# Altium PCB QuadCape_4L_PCB.PcbDoc
Units mil, origin at the board's own origin, x right, y up, seen from the top; angles counter-clockwise.
Board outline 3750 x 4475 mil, 4 copper layers (Top Layer, Power layer, Ground layer, Bottom Layer), stack 40.75 mil thick; 81 components, 111 nets, 353 pads, 56 vias.
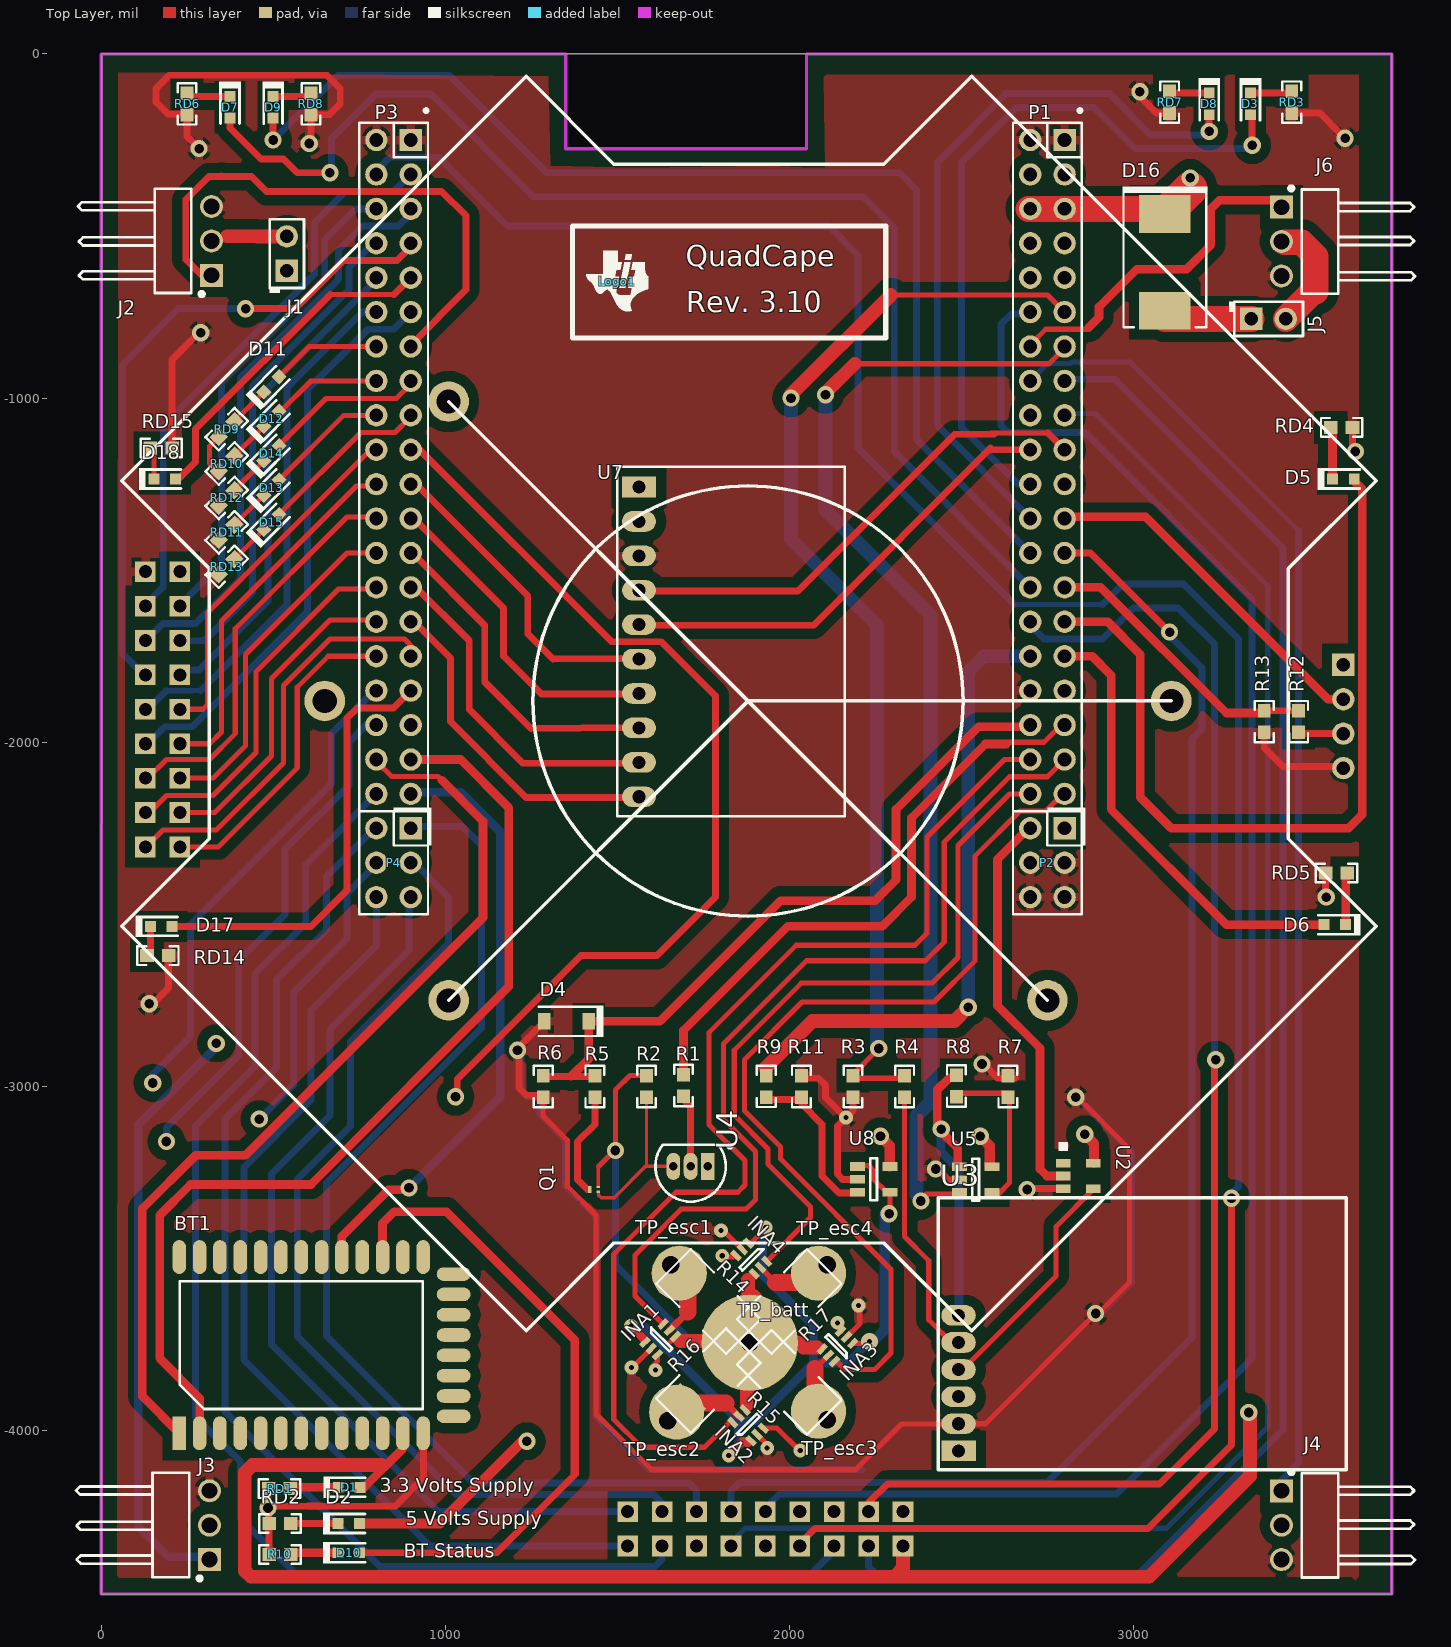
[diagram p0: Top Layer view]
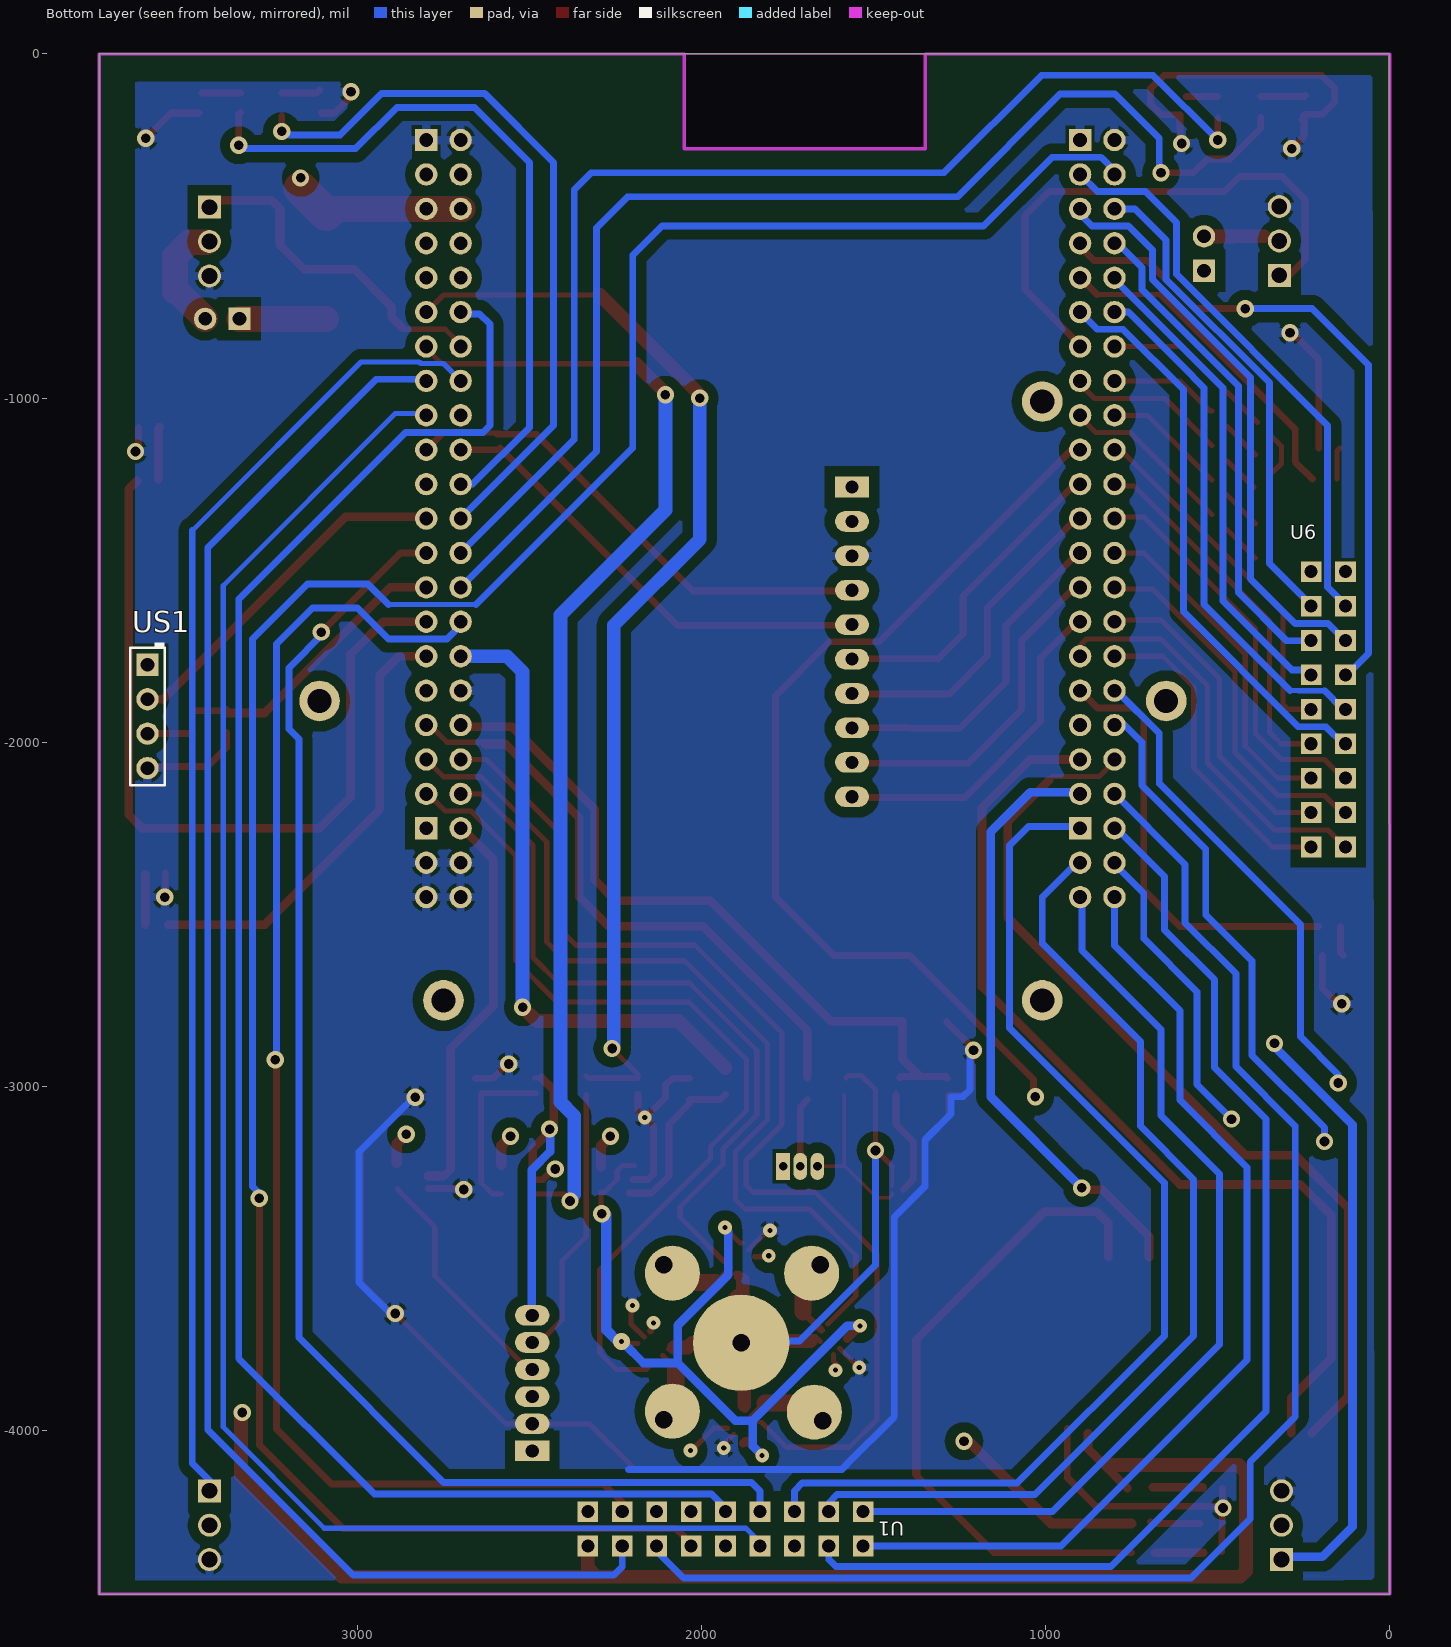
[diagram p1: Bottom Layer view, seen from below]
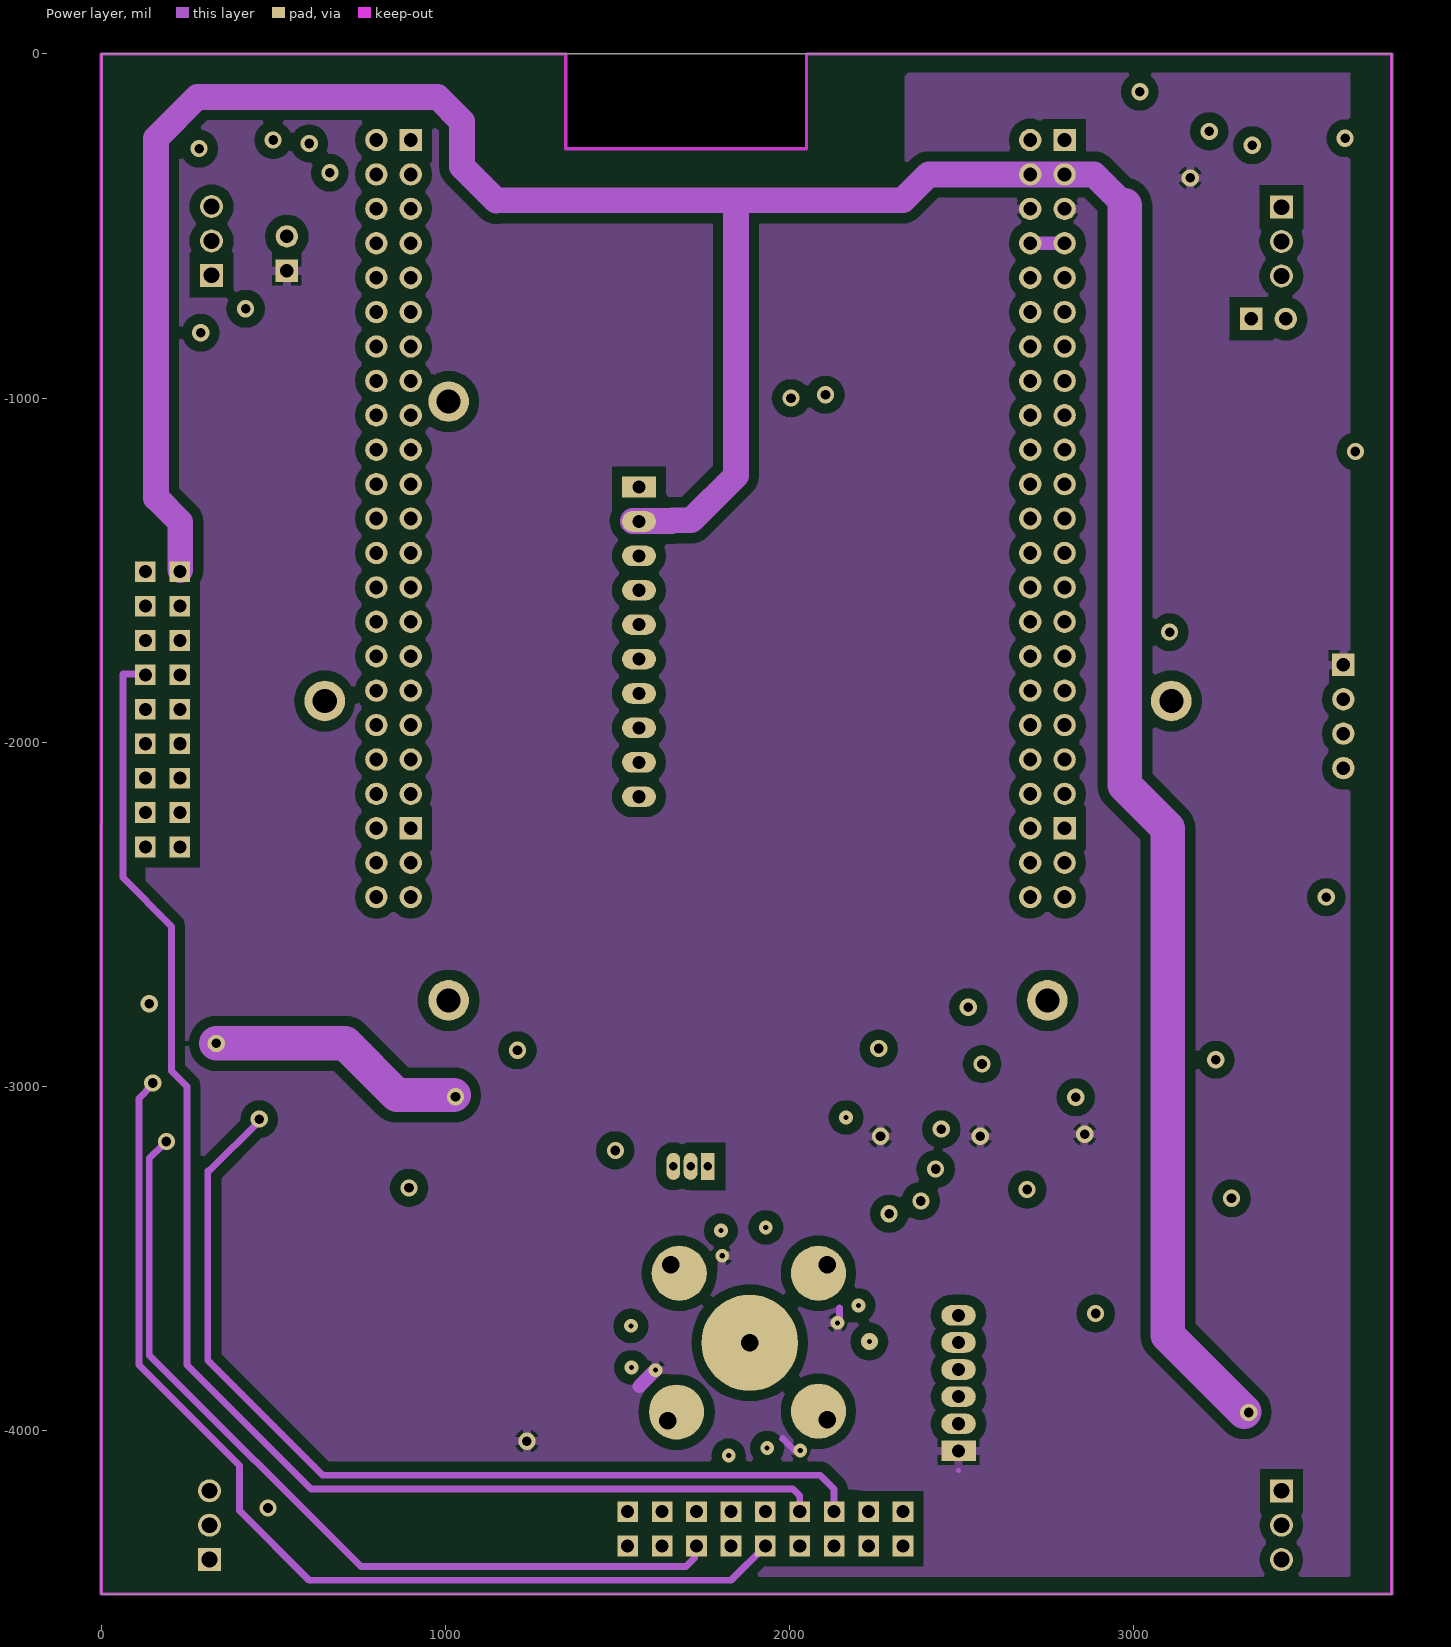
[diagram p2: Power layer]
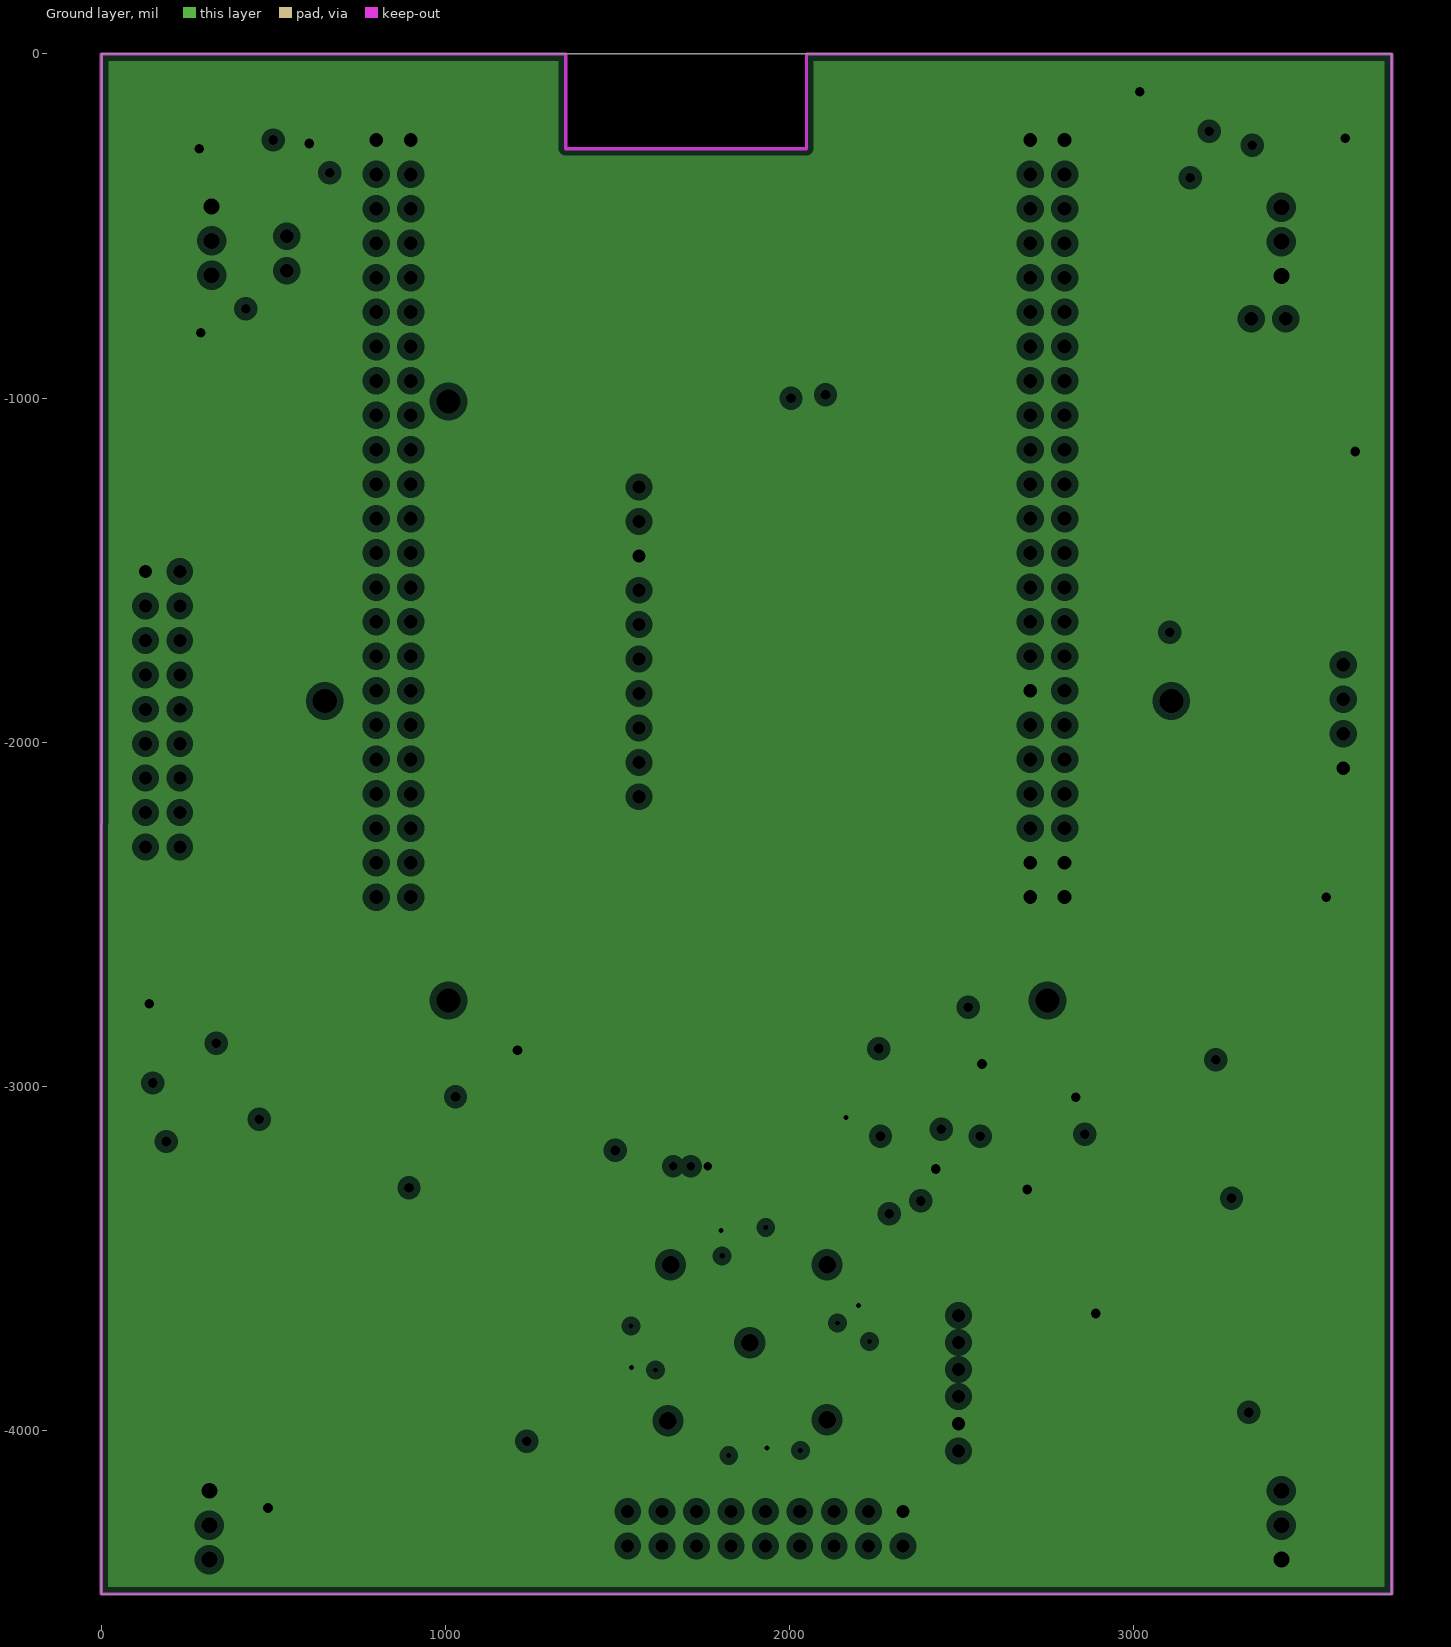
[diagram p3: Ground layer, clearances drawn from the general rule]

## Layer stack, top to bottom
Top Layer: signal copper 1.4
Dielectric: core 10, FR-4, Dk 4.8
Power layer: signal copper 1.4
Dielectric: prepreg 12.6, FR-4, Dk 4.8
Ground layer: plane copper 1.35, net GND
Dielectric: core 12.6, FR-4, Dk 4.8
Bottom Layer: signal copper 1.4

## Board outline
0,-4475 1.45,0 3750,0 3750,-4475
cut-out: 1350,0 1350,-275 2050,-275 2050,0

## Design rules (kind name [scope] priority, off if disabled: settings)
AssemblyTestPointUsage [All] p1 off:
AssemblyTestpoint [All] p1 off: testpointundercomponent=TRUE minsize=40 maxsize=100 preferedsize=60 minholesize=0 maxholesize=40 preferedholesize=32 testpointgrid=1 usegrid=TRUE gridtolerance=0.01 allowsidetop=TRUE allowsidebottom=TRUE
Clearance [All vs InPolygon] p1: gap=30
Clearance Clearance_1 [All] p2: gap=7
ComponentClearance [All] p1 off: gap=10 collisioncheckmode=3 verticalgap=10 showdistances=FALSE
DiffPairsRouting [All] p1 off: maxlimit=10 minlimit=10 mostfreqgap=10 maxuncoupledlength=500
FabricationTestPointUsage TestPointUsage [All] p1 off: valid=0 allowmultiple=FALSE
FabricationTestpoint Testpoint [All] p1 off: side=3 testpointundercomponent=TRUE minsize=40 maxsize=100 preferedsize=60 minholesize=0 maxholesize=40 preferedholesize=32 testpointgrid=1 allowsidetop=TRUE allowsidebottom=TRUE usegrid=TRUE gridtolerance=0.01
FanoutControl Fanout_BGA [IsBGA] p1 off: bgadir=Out bgaviamode=Centered fanoutstyle=Auto fanoutdirection=Alternating viagrid=1 // Fanout_BGA (Default Rule)
FanoutControl Fanout_LCC [IsLCC] p2 off: bgadir=Out bgaviamode=Centered fanoutstyle=Auto fanoutdirection=Alternating viagrid=1 // Fanout_LCC (Default Rule)
FanoutControl Fanout_SOIC [IsSOIC] p3 off: bgadir=Out bgaviamode=Centered fanoutstyle=Auto fanoutdirection=Alternating viagrid=1 // Fanout_SOIC (Default Rule)
FanoutControl Fanout_Small [(CompPinCount < 5)] p4 off: bgadir=Out bgaviamode=Centered fanoutstyle=Auto fanoutdirection=OutThenIn viagrid=1 // Fanout_Small (Default Rule)
FanoutControl Fanout_Default [All] p5 off: bgadir=Out bgaviamode=Centered fanoutstyle=Auto fanoutdirection=Alternating viagrid=1 // Fanout_Default (Default Rule)
Height [All] p1 off: minheight=0 maxheight=1000 prefheight=500
HoleSize [All] p1: absolutevalues=TRUE maxlimit=400 minlimit=15 maxpercent=80.000 minpercent=20.000
HoleToHoleClearance [All] p1: gap=8 allowstackedmicrovias=TRUE
LayerPairs [All] p1 off: enforce=FALSE
MinimumSolderMaskSliver [All] p1: minsoldermaskwidth=4
PlaneClearance [All] p1: clearance=20
PlaneConnect [All] p1: planeconnectstyle=Relief reliefexpansion=20 reliefentries=4 reliefconductorwidth=10 reliefairgap=10
PolygonConnect [All] p1: connectstyle=Relief reliefconductorwidth=25 reliefentries=4 polygonreliefangle="90 Angle" airgapwidth=10
RoutingVias [All] p1: holewidth=15 width=25 viastyle="Through Hole" minholewidth=15 minwidth=25 maxholewidth=400 maxwidth=500
SilkToSilkClearance [All] p1: silktosilkclearance=5
SilkscreenOverComponentPads [All] p1: minsilkscreentomaskgap=5
SolderMaskExpansion [All] p1: expansion=2
Width [All] p1: maxlimit=100 minlimit=6 preferedwidth=15 toplayer_minwidth=10 midlayer1_prefwidth=10 bottomlayer_minwidth=10 minimp=50.000000 maximp=50.000000 favimp=50.000000
8 further rules are at their usual default settings.

## Classes and differential pairs
component class Header: J1 J2 J3 J4 J5 J6 P1 P2 P3 P4 US1

## Components (designator, comment, footprint, x,y, rotation, side; value= is the part's Value field where it differs from the comment)
BT1 "HC-06" HC-06 227.44,-4007.86 r90 top
D1 "150060YS75000" WL-SMCW_YELLOW 720.68,-4165.07 r0 top
D2 "150060YS75000" WL-SMCW_YELLOW 720,-4270 r0 top
D3 "150060YS75000" WL-SMCW_YELLOW 3340,-145 r270 top
D4 "MMSZ4678T1G" SOD-123 1352.16,-2810.94 r180 top
D5 "150060YS75000" WL-SMCW_YELLOW 3610,-1235 r0 top
D6 "150060YS75000" WL-SMCW_YELLOW 3585,-2530 r180 top
D7 "150060YS75000" WL-SMCW_YELLOW 375,-155 r270 top
D8 "150060YS75000" WL-SMCW_YELLOW 3220,-145 r270 top
D9 "150060YS75000" WL-SMCW_YELLOW 500,-155 r270 top
D10 "150060YS75000" WL-SMCW_YELLOW 720,-4355 r0 top
D11 "150060YS75000" WL-SMCW_YELLOW 495,-960 r45 top
D12 "150060YS75000" WL-SMCW_YELLOW 495,-1060 r45 top
D13 "150060YS75000" WL-SMCW_YELLOW 495,-1260 r45 top
D14 "150060YS75000" WL-SMCW_YELLOW 495,-1160 r45 top
D15 "150060YS75000" WL-SMCW_YELLOW 495,-1360 r45 top
D16 "CDBC520-G" SMC 3091.16,-605.55 r270 top
D17 "150060YS75000" WL-SMCW_YELLOW 175,-2535 r0 top
D18 "150060YS75000" WL-SMCW_YELLOW 185,-1235 r0 top
INA1 "INA213AIDCK" DCK0006A_N 1625,-3735 r45 top
INA2 "INA213AIDCK" DCK0006A_N 1880,-3985 r135 top
INA3 "INA213AIDCK" DCK0006A_N 2140,-3755 r225 top
INA4 "INA213AIDCK" DCK0006A_N 1890,-3500 r315 top
J1 "5-146278-2" TE_5-146278-2 540,-580 r90 top
J2 "PEC03SBAN" Sullins_PEC03SBAN 321.04,-543.19 r90 top
J3 "PEC03SBAN" Sullins_PEC03SBAN 315,-4275 r90 top
J4 "PEC03SBAN" Sullins_PEC03SBAN 3430,-4275 r270 top
J5 "5-146278-2" TE_5-146278-2 3392.68,-769.72 r0 top
J6 "PEC03SBAN" Sullins_PEC03SBAN 3430,-545 r270 top
Logo1 "Texas Instruments" TI_Symbol_Overlay_Small 1500,-660 r0 top
P1 "Comment" TSW-120-07-G-D 2750,-1200 r270 top locked
P2 "Comment" SULLINS_PEC03DAAN 2750,-2350 r270 top locked
P3 "Comment" TSW-120-07-G-D 850,-1200 r270 top locked
P4 "Comment" SULLINS_PEC03DAAN 850,-2350 r270 top locked
Q1 "CSD25483F4" YJC0003A 1432.59,-3299.31 r90 top
R1 "CRCW040243K2FKED" 0603 1692.54,-2997.33 r270 top
R2 "CRCW040243K2FKED" 0603 1585,-3000 r90 top
R3 "CRCW0402100KFKED" 0603 2185,-3000 r90 top
R4 "CRCW040251K0JNED" 0603 2335,-3000 r90 top
R5 "CRCW040243K2FKED" 0603 1435,-3000 r270 top
R6 "CRCW040224K3FKED" 0603 1285,-3000 r90 top
R7 "CRCW040226K1FKED" 0603 2635,-3000 r270 top
R8 "CRCW040212K4FKED" 0603 2485.46,-2998.86 r90 top
R9 "CRCW040210K0JNED" 0603 1932.79,-2999.91 r270 top
R10 "RT0603DRE07459RL" 0603 520,-4360 r180 top
R11 "CRCW040210K0JNED" 0603 2035,-3000 r270 top
R12 "RT0603DRE07459RL" 0603 3480,-1940 r270 top
R13 "RT0603DRE07459RL" 0603 3380,-1940 r90 top
R14 "CSNL2010FT1L00" 2010M 1765,-3625 r135 top
R15 "CSNL2010FT1L00" 2010M 2000,-3860 r135 top
R16 "CSNL2010FT1L00" 2010M 1765,-3855 r225 top
R17 "CSNL2010FT1L00" 2010M 2000,-3625 r225 top
RD1 "RT0603DRE07459RL" 0603 518.61,-4168.81 r180 top
RD2 "RT0603DRE07459RL" 0603 520,-4270 r180 top
RD3 "RT0603DRE07459RL" 0603 3460,-140 r270 top
RD4 "RT0603DRE07459RL" 0603 3605,-1085 r0 top
RD5 "RT0603DRE07459RL" 0603 3590,-2380 r180 top
RD6 "RT0603DRE07459RL" 0603 250,-145 r270 top
RD7 "RT0603DRE07459RL" 0603 3105,-140 r270 top
RD8 "RT0603DRE07459RL" 0603 610,-145 r270 top
RD9 "RT0603DRE07459RL" 0603 365,-1090 r225 top
RD10 "RT0603DRE07459RL" 0603 365,-1190 r225 top
RD11 "RT0603DRE07459RL" 0603 365,-1390 r225 top
RD12 "RT0603DRE07459RL" 0603 365,-1290 r225 top
RD13 "RT0603DRE07459RL" 0603 365,-1490 r225 top
RD14 "RT0603DRE07459RL" 0603 165,-2620 r0 top
RD15 "RT0603DRE07459RL" 0603 175,-1145 r0 top
TP_batt "TESTPOINT" TESTPOINT#1 1885,-3745 r0 top
TP_esc1 "TESTPOINT" TESTPOINT#2 1655.08,-3517.87 r270 top
TP_esc2 "TESTPOINT" TESTPOINT#2 1647.33,-3971.26 r0 top
TP_esc3 "TESTPOINT" TESTPOINT#2 2109.75,-3968.67 r90 top
TP_esc4 "TESTPOINT" TESTPOINT#2 2109.75,-3517.87 r180 top
U1 "OV7670" HEADER_2X9 2330.38,-4335.65 r180 bottom
U2 "SN74LVC1G04DBV" SOT23-5P 2840.58,-3260.45 r0 top
U3 "SKM53" SKM53 2432.81,-4114.13 r0 top
U4 "LP395Z" Z03A 1713.21,-3232.41 r90 top
U5 "OPA735AIDBVR" DBV0005A_N 2541.22,-3271.13 r0 top
U6 "OV7670" HEADER_2X9 228.89,-1504.28 r270 bottom
U7 "IMU_10DOF" IMU_10DOF 1500,-2215 r0 top
U8 "OPA735AIDBVR" DBV0005A_N 2245,-3270 r0 top
US1 "5-146278-4" TE_5-146278-4 3610,-1925 r270 bottom

## Footprints (in the part's own frame and the unit in brackets; to place one, negate y for a bottom-side part, rotate by r counter-clockwise, add the part's x,y. Pads: shape width x height; smd on the part's side, far side on the other; paste and mask are expansions set on the pad)
0603 [mm] "0603 from SM-752 data"
  rect 1x0.95 smd: 1(-0.8,0) 2(0.8,0)
  silkscreen extent -1.52,-0.69 1.52,0.69, body extent -0.87,-0.47 0.87,0.47, height 0.85
2010M [mm]
  rect 1.6x2.7 smd: 1(-2.4,0) 2(2.4,0)
  silkscreen extent -3.65,-1.8 3.65,1.8, body extent -2.73,-1.45 2.73,1.45, height 1.66
DBV0005A_N [mm] "SOT23, 5-Leads, Body 2.9x1.6mm, Pitch 0.95mm, Lead Span 2.8mm, IPC Medium Density"
  rect 1.1x0.65 smd: 1(-1.2,0.95) 2(-1.2,0) 3(-1.2,-0.95) 4(1.2,-0.95) 5(1.2,0.95)
  silkscreen extent -0.25,-1.55 0.25,1.55, body extent -1.42,-1.46 1.42,1.46, height 1.08
DCK0006A_N [mm] "SOT23, 6-Leads, Body 2x1.3mm, Pitch 0.65mm, Lead Span 2.1mm, IPC Medium Density"
  rect 0.85x0.4 smd: 1(-0.95,0.65) 2(-0.95,0) 3(-0.95,-0.65) 4(0.95,-0.65) 5(0.95,0) 6(0.95,0.65)
  silkscreen extent -0.15,-1.1 0.15,1.1, body extent -1.14,-1 1.14,1, height 0.94
HC-06 [mm]
  rect 2.5x1 smd: 1(0,0)
  oval 2.5x1 smd: 2(0,-1.5) 3(0,-3) 4(0,-4.5) 5(0,-6) 6(0,-7.5) 7(0,-9) 8(0,-10.5) 9(0,-12) 10(0,-13.5) 11(0,-15) 12(0,-16.5) 13(0,-18) 22(13,-18) 23(13,-16.5) 24(13,-15) 25(13,-13.5) 26(13,-12) 27(13,-10.5) 28(13,-9) 29(13,-7.5) 30(13,-6) 31(13,-4.5) 32(13,-3) 33(13,-1.5) 34(13,0)
  oval 1x2.5 smd: 14(1.25,-20.25) 15(2.75,-20.25) 16(4.25,-20.25) 17(5.75,-20.25) 18(7.25,-20.25) 19(8.75,-20.25) 20(10.25,-20.25) 21(11.75,-20.25)
  silkscreen extent 1.79,-17.96 11.21,-0.04
HEADER_2X9 [mil]
  rect 60x60 hole 38: 1(0,0) 2(0,100) 3(100,0) 4(100,100) 5(200,0) 6(200,100) 7(300,0) 8(300,100) 9(400,0) 10(400,100) 11(500,0) 12(500,100) 13(600,0) 14(600,100) 15(700,0) 16(700,100) 17(800,0) 18(800,100)
IMU_10DOF [mm]
  rect 2.5x1.524 hole 0.966: 1(1.6,24.3)
  oval 2.5x1.524 hole 0.966: 2(1.6,21.76) 3(1.6,19.22) 4(1.6,16.68) 5(1.6,14.14) 6(1.6,11.6) 7(1.6,9.06) 8(1.6,6.52) 9(1.6,3.98) 10(1.6,1.44)
  silkscreen extent 0,0 16.8,25.8
SKM53 [mil] "GPS Module"
  rect 100x60 hole 38.03: 1(59.06,55.12)
  oval 100x60 hole 38.03: 2(59.06,133.86) 3(59.06,212.6) 4(59.06,291.34) 5(59.06,370.08) 6(59.06,448.82)
  silkscreen extent 0,0 1185,790
SMC [mil] "Molded Diode, 2-Leads, Body 6.9x5.8mm, IPC Medium Density, based on OnSemi component dimensions and land patterns"
  rect 110x150 smd: 1(-140.49,0) 2(140.49,0)
  silkscreen extent -221,-124 189,123, body extent -156,-116 156,116, height 91
SOD-123 [mm] "On Semi recommended land pattern"
  rect 0.915x1.22 smd: 1(-1.637,0) 2(1.637,0)
  silkscreen extent -2.74,-1.17 2.03,1.17, body extent -1.93,-0.9 1.93,0.9, height 1.35
SOT23-5P [mil]
  rect 42x25 smd: 1(-45,37) 2(-45,0) 3(-45,-37) 4(42,-37) 5(42,37)
  silkscreen extent -57,73 -32,98
SULLINS_PEC03DAAN [mm] "SULLINS"
  rect 1.65x1.65 hole 1.016 mask+0: 1(-2.54,1.27)
  round 1.65 hole 1.016 mask+0: 2(-2.54,-1.27) 3(0,1.27) 4(0,-1.27) 5(2.54,1.27) 6(2.54,-1.27)
  silkscreen extent -4.06,-2.54 3.81,2.79, body extent -3.81,-2.54 3.81,2.54, height 8.38
Sullins_PEC03SBAN [mm] "Sullins"
  rect 1.7x1.7 hole 1.16: 1(-2.54,0)
  round 1.7 hole 1.16: 2(0,0) 3(2.54,0)
  silkscreen extent -4.07,0.58 3.86,9.85, body extent -3.81,-0.29 3.81,9.94, height 3.56
TE_5-146278-2 [mm] "TE CONNECTIVITY"
  rect 1.65x1.65 hole 1: 1(-1.27,0)
  round 1.65 hole 1: 2(1.27,0)
  silkscreen extent -2.92,-1.27 2.54,1.27, body extent -2.41,-1.17 2.41,1.17, height 8.13
TE_5-146278-4 [mm] "TE CONNECTIVITY"
  rect 1.65x1.65 hole 1: 1(-3.81,0)
  round 1.65 hole 1: 2(-1.27,0) 3(1.27,0) 4(3.81,0)
  silkscreen extent -5.46,-1.27 5.08,1.27, body extent -4.95,-1.17 4.95,1.17, height 8.13
TESTPOINT#1 [mil]
  round 280 hole 50.8: 1(0,0)
TESTPOINT#2 [mil]
  round 160 hole 50.8 copper offset 25,25: 1(0,0)
TI_Symbol_Overlay_Small [mil]
  silkscreen extent -90,-88 91,88
TSW-120-07-G-D [mm] "Samtec 100mil, 2x20, 230 mil above insulator"
  rect 1.65x1.65 hole 1.016 mask+0: 1(-24.13,1.27)
  round 1.65 hole 1.016 mask+0: 2(-24.13,-1.27) 3(-21.59,1.27) 4(-21.59,-1.27) 5(-19.05,1.27) 6(-19.05,-1.27) 7(-16.51,1.27) 8(-16.51,-1.27) 9(-13.97,1.27) 10(-13.97,-1.27) 11(-11.43,1.27) 12(-11.43,-1.27) 13(-8.89,1.27) 14(-8.89,-1.27) 15(-6.35,1.27) 16(-6.35,-1.27) 17(-3.81,1.27) 18(-3.81,-1.27) 19(-1.27,1.27) 20(-1.27,-1.27) 21(1.27,1.27) 22(1.27,-1.27) 23(3.81,1.27) 24(3.81,-1.27) 25(6.35,1.27) 26(6.35,-1.27) 27(8.89,1.27) 28(8.89,-1.27) 29(11.43,1.27) 30(11.43,-1.27) 31(13.97,1.27) 32(13.97,-1.27) 33(16.51,1.27) 34(16.51,-1.27) 35(19.05,1.27) 36(19.05,-1.27) 37(21.59,1.27) 38(21.59,-1.27) 39(24.13,1.27) 40(24.13,-1.27)
  silkscreen extent -26.42,-2.54 25.4,2.54, body extent -25.4,0 25.4,5.08, height 8.38
WL-SMCW_YELLOW [mm] "WURTH"
  rect 0.8x0.8 smd: 1(-0.8,0) 2(0.8,0)
  silkscreen extent -1.9,-0.8 1.2,0.8, body extent -0.85,-0.45 0.85,0.45, height 0.8
YJC0003A [mm] "TI"
  rect 0.16x0.26 smd: 1(-0.175,-0.325) 2(0.175,-0.325)
  rect 0.51x0.26 smd: 3(0,0.325)
  body extent -0.32,-0.52 0.32,0.52, height 0.35
Z03A [mm] "TO, Flat Index; 3 In-Line, Axial Leads; Body Dia. 5mm; Leads 0.55 x 0.50 mm (max)"
  rect 2x1.016 hole 0.635: 1(0,-1.27)
  oval 2x1.016 hole 0.635: 2(0,0)
  oval 2x1 hole 0.635: 3(0,1.27)
  silkscreen extent -2.6,-3.03 1.6,2.6, body extent -2.61,-2.61 1.6,2.61, height 5.2

## Part data
D1 D2 D3 D5 D6 D7 D8 D9 D10 D11 D12 D13 D14 D15 D17 D18: "LED, Yellow, SMD"
D4: "Diode, Zener, 1.8V, 500mW, SOD-123"
D16: "Diode, Schottky, 20V, 5A, SMC"
INA1 INA2 INA3 INA4: "Voltage Output, High or Low Side Measurement, Bi-Directional Zero-Drift Series Current-Shunt Monitor, DCK0006A"
J1 J5: "Header, 100mil, 2x1, Tin, TH"
J2 J3 J4 J6: "Header, 100mil, 3x1, Tin, R/A, TH"
Logo1: library part TI_Logo, "Texas Instrument Corporate Signature"
P1 P3: library part TSW-120-07-G-D, "Header, 100mil, 20x2, Gold, TH"
P2 P4: library part PEC03DAAN, "Header, 100mil, 3x2, Tin, TH"
Q1: "MOSFET, P-CH, -20V, -1.6A, 1.0x0.35x0.6mm"
R1 R2 R5: "RES, 43.2k ohm, 1%, 0.063W, 0402"
R3: "RES, 100k ohm, 1%, 0.063W, 0402"
R4: "RES, 51k ohm, 5%, 0.063W, 0402"
R6: "RES, 24.3k ohm, 1%, 0.063W, 0402"
R7: "RES, 26.1k ohm, 1%, 0.063W, 0402"
R8: "RES, 12.4k ohm, 1%, 0.063W, 0402"
R9 R11: "RES, 10k ohm, 5%, 0.063W, 0402"
R10 R12 R13 RD1 RD2 RD3 RD4 RD5 RD6 RD7 RD8 RD9 RD10 RD11 RD12 RD13 RD14 RD15: "RES, 459 ohm, 0.5%, 0.1W, 0603"
R14 R15 R16 R17: "RES, 0.001 ohm, 1%, 1.5W, 2010"
TP_batt TP_esc1 TP_esc2 TP_esc3 TP_esc4: "TEST POINT.  No entry in BOM."
U1 U6: library part HEADER_2X9, "Header, Male 2x9 pin, 100mil spacing"
U2: "IC, Single Inverter"
U4: "Ultra Reliable Power Transistor, 3-pin TO-92"
U5 U8: "0.05 uV/degC (Max), Single-Supply CMOS Zero-Drift Series Operational Amplifier, 2.7 to 12 V, -40 to 85 degC, 5-pin SOT23 (DBV0005A), Green (RoHS & no Sb/Br)"
US1: "Header, 100mil, 4x1, Tin, TH"

## Free pads (board coordinates)
  round 118 hole 70: 0(650,-1880) 0(1010,-2750) 0(1010,-1010) 0(2750,-2750) 0(3110,-1880)

## Via types
v1: diameter 50, hole 28, Top Layer to Bottom Layer, 43 vias
v2: diameter 40, hole 15, Top Layer to Bottom Layer, 11 vias
v3: diameter 50, hole 15, Top Layer to Bottom Layer, 1 vias
v4: diameter 40, hole 15, Top Layer to Bottom Layer, tented bottom, 1 vias

## Nets (pads, with @x,y where several pads share a name; then routed paths per layer and width w, separated by ;. In a path a pad name is that pad's centre, name@x,y a point inside that pad or via, vN(x,y) a via of type N, cw(c..) or ccw(c..) an arc to the next point about the centre after c; other vN are vias at no path point)
AIN0: D4.1 P1.36 R5.1 R6.2 | length 2064.9
  Top Layer w20: R6.2@1285,-2976.38 1289.86,-2971.52 1421.52,-2971.52 R5.1@1425,-2975
  Top Layer w25: 1366.26,-2970.64 1416.63,-2920.26 D4.1 1624.06,-2810.94 1975,-2460 2250,-2460 ; 2255,-2455 2310,-2400 2310,-2195 2550,-1955 P1.36@2690,-1955
AIN1: INA1.6 P1.37 | length 2645.4
  Top Layer w15: INA1.6 1551.74,-3608.85 1551.74,-3490.75 1686.08,-3356.41 1874.67,-3356.41 1901.79,-3329.29 1901.79,-3188.88 1808.79,-3095.88 1808.79,-2876.21 2050,-2635 2395,-2635 2450,-2580 2450,-2290 2640,-2100 2750,-2100 P1.37
AIN2: INA2.6 P1.38 | length 3270.6
  Top Layer w10: INA2.6@1825.36,-3976.65 INA2.6
  Top Layer w15: INA2.6@1825.36,-3976.65 1753.25,-4048.76 1571.12,-4048.76 1490,-3967.64 1490,-3487.91 1670.58,-3307.33 1850.12,-3307.33 1870.79,-3286.66 1870.79,-3215.56 1766.16,-3110.94 1766.16,-2843.84 2020,-2590 2365,-2590 2400,-2555 2400,-2275 2625,-2050 P1.38 P1.38@2705,-2050
AIN3: INA4.6 P1.40 | length 2112.5
  Top Layer w15: INA4.6 2061.96,-3380.93 2061.96,-3349.96 1937.96,-3225.95 1937.96,-3181.63 1839.79,-3083.47 1839.79,-2894.69 2034.48,-2700 2415,-2700 2490,-2625 2490,-2300 2640,-2150 P1.40@2695,-2150
AIN4: INA3.6 P1.39 | length 2646.5
  Top Layer w10: INA3.6 INA3.6@2138.25,-3799.54
  Top Layer w15: INA3.6@2138.25,-3799.54 2161.42,-3822.71 2247.96,-3822.71 2295.75,-3774.92 2295.75,-3532.08 1974.13,-3210.45 1974.13,-3175.58 1869.5,-3070.95 1869.5,-2922.67 2037.17,-2755 2420,-2755 2540,-2635 2540,-2330 2670,-2200 2745,-2200 P1.39@2795,-2150
BATT(+): INA1.4 INA2.4 INA3.4 INA4.4 Q1.2 R2.2 R14.1 R15.2 R16.1 R17.2 TP_batt.1 | length 2655.2
  Top Layer w10: Q1.2@1445.38,-3289.81 1445.38,-3232.52
  Top Layer w15: 1445.38,-3232.52 1495,-3182.9 1495,-3010 1536.92,-2968.08 1573.08,-2968.08 R2.2@1580,-2975 ; 1655.19,-3741 INA1.4 1682.89,-3726.65 1682.89,-3740 ; INA2.4 1876.11,-3940.46 1876.11,-3925.42 ; TP_batt.1@1880,-3740 1880,-3676.5 1912.87,-3676.5 1928.19,-3691.81 1928.19,-3624 1901.37,-3597.19 1893.81,-3597.19 1831.81,-3659.19 R14.1 1831.81,-3740 1831.81,-3752 1824.27,-3753.65 1786,-3762 1786,-3788.19 R16.1 1831.81,-3820 1862.7,-3850.88 TP_batt.1@1891.83,-3850.88 ; INA4.4@1889,-3544.54 1889,-3555 1898.35,-3555 INA4.4 ; TP_batt.1@1891.83,-3865.28 TP_batt.1@1891.83,-3850.88 ; TP_batt.1@1949.23,-3788.19 1928.19,-3788.19 1917.3,-3850.88 TP_batt.1@1891.83,-3850.88 ; 2080.42,-3758.89 2080.42,-3763.35 INA3.4
  Top Layer w20: 1880,-3562.89 INA4.4@1898.06,-3544.83
  Top Layer w40: 1682.89,-3740 1831.81,-3740 TP_batt.1@1880,-3740 ; 1876.11,-3925.42 1876.11,-3881 TP_batt.1@1891.83,-3865.28 ; TP_batt.1@1880,-3676.5 1880,-3562.89 ; TP_batt.1@1930.21,-3745.21 2027.32,-3745.21 2041,-3758.89 2080.42,-3758.89
  Bottom Layer w20: v1@1494.52,-3181.65 1494.52,-3519.52 1715,-3740 TP_batt.1@1880,-3740
  other v1: 1494.52,-3186.06
DC_3.3V: BT1.12 D1.2 P1.3 P1.4 U1.1 U6.1 U7.2 | length 13455.5
  Top Layer w25: D1.2@762.79,-4167.33 877.05,-4053.07 BT1.12
  Top Layer w40: 815,-4100 440,-4100 417.92,-4122.08 417.92,-4407.92 435,-4425 2305,-4425 ; U1.1 2330.38,-4399.62 2305,-4425 ; v1@3338.67,-3947.37 3338.67,-4132.14 3045.81,-4425 2305,-4425
  Power layer w75: U6.1@230,-1500 230,-1360 160,-1290 160,-245 280,-125 978.39,-125 1048.73,-195.34 1048.73,-326.59 1148.52,-426.38 ; 1155.03,-425 1845,-425 ; U7.2@1545.08,-1356.82 1658.1,-1356.82 1659.6,-1355.33 ; 1659.6,-1355 1715,-1355 1845,-1225 1845,-425 ; 2980,-445 2975,-440 2885,-350 P1.3 P1.4 2405,-350 2330,-425 1845,-425
  Power layer w100: 2975,-440 2975,-2125 3100,-2250 3100,-3723.63 v1@3321.87,-3945.5
  other v1: 3334.94,-3947.37
EHRPWM1A: J6.1 P1.14 | length 981.7
  Top Layer w15: P1.14@2705,-840 2745,-800 2865,-800 2870,-795
  Top Layer w25: 2870,-795 2900,-765 2900,-735 3010,-625 3155,-625 3225,-555 3225,-450 3250,-425 J6.1@3435.72,-425
EHRPWM1B: J4.1 P1.16 | length 3790.7
  Bottom Layer w15: P1.16 2750.27,-899.73 2814.75,-899.73 2817.5,-896.98 2819.46,-896.98 2821.44,-895 2990,-895 3480.09,-1385.09
  Bottom Layer w20: J4.1@3427.07,-4147.98 3480.09,-4094.96 3480.09,-1385.09
EHRPWM2A: J3.1 P3.19 | length 5265.4
  Top Layer w20: P3.19 925,-1150 1482.84,-1707.84 1627.84,-1707.84 1785,-1865 1785,-2450 1615,-2620 1395,-2620 1035,-2980 v1@1035,-3045
  Power layer w100: v1(335,-2875) 710,-2875 860,-3025 v1@1025,-3025
  Bottom Layer w25: J3.1@292.88,-4367.21 196.2,-4367.21 108.49,-4279.51 108.49,-3111.51 v1@337.5,-2882.5
  other v1: 1030,-3030
EHRPWM2B: J2.1 P3.13 | length 1595.3
  Top Layer w20: J2.1@317.35,-642.2 291.35,-642.2 246.3,-597.15 246.3,-423.29 313.19,-356.4 437.46,-356.4 481.06,-400 990,-400 1060,-470 1060,-685 P3.13@900,-845 ; 350.37,-355 351.77,-356.4
ESC_1: INA1.5 R14.2 TP_esc1.1 | length 165.7
  Top Layer w20: INA1.5 1705,-3655
  Top Layer w50: 1705,-3655 TP_esc1.1@1705,-3565
ESC_2: INA2.5 R16.2 TP_esc2.1 | length 159.5
  Top Layer w20: 1815,-3920 INA2.5
  Top Layer w50: TP_esc2.1@1710,-3920 1815,-3920
ESC_3: INA3.5 R15.1 TP_esc3.1 | length 163.7
  Top Layer w15: TP_esc3.1@2065,-3925 TP_esc3.1@2075,-3915 ; 2075,-3820 INA3.5
  Top Layer w50: TP_esc3.1@2075,-3915 2075,-3820
ESC_4: INA4.5 R17.1 TP_esc4.1 | length 161.6
  Top Layer w15: INA4.5 1960,-3570
  Top Layer w50: 1960,-3570 TP_esc4.1@2060,-3570
GND: BT1.13 D4.2 INA1.2 INA2.2 INA3.2 INA4.2 J2.3 J3.3 J4.3 J6.3 P1.1 P1.2 P1.34 P2.3 P2.4 P2.5 P2.6 P3.1 P3.2 R3.1 R6.1 R7.1 R10.2 R11.1 R13.1 RD1.2 RD2.2 RD3.2 RD4.2 RD5.2 RD6.2 RD7.2 RD8.2 RD9.2 RD10.2 RD11.2 RD12.2 RD13.2 RD14.2 RD15.2 U1.2 U2.3 U3.2 U4.1 U5.2 U6.2 U7.3 U8.2 US1.4 | length 10892.4
  Top Layer w15: RD10.2@340,-1215 315,-1190 315,-1140 RD9.2 ; R6.1@1283.94,-3028.94 1283.94,-3085.49 1354.69,-3156.25 1354.69,-3290.4 1438.31,-3374.01 1438.31,-3951.98 1600.38,-4114.05 2192.33,-4114.05 2325.68,-3980.7 U3.2@2488.69,-3980.7 ; v2@1536.07,-3823.93 INA1.2 ; v2@1807.8,-3418.4 1862.96,-3473.55 INA4.2 ; INA2.2 1940.1,-4045.1 v4@1944.54,-4045.1 ; INA3.2 2204.61,-3690.39 v2@2204.61,-3627.05 ; U3.2@2499.77,-3980.19 2569.81,-3980.19 v1(2890,-3660) ; v1@2834.97,-3029.44 2988.42,-3182.89 2988.42,-3568.81 v1@2886.42,-3670.81
  Top Layer w20: v1@145,-2765 196.5,-2713.5 RD14.2 ; RD15.2 206.5,-888.5 v1@285,-810 ; RD6.2 RD6.2@250,-185 ; RD6.2@255,-190 RD6.2@250,-185 ; v1(285,-275) 250,-240 RD6.2@250,-185 ; 487.12,-4295 v1@487.12,-4230 ; RD1.2 v1@487.12,-4230 ; R10.2@488.5,-4351.5 RD2.2@488.5,-4280 ; v1@610,-260 RD8.2 663.5,-176.5 695,-145 695,-100 656.96,-61.96 198.04,-61.96 160,-100 160,-140 195,-175 240,-175 RD6.2@250,-185 ; BT1.13@937.41,-3994.19 937.41,-4136.25 853.66,-4220 497.12,-4220 v1@487.12,-4230 ; 1235,-3025 1214.77,-3004.78 1214.77,-3002.35 1214.77,-2886.09 1287.7,-2813.17 D4.2 ; 1238.26,-3025.83 R6.1@1282.88,-3025.83 ; R11.1@2035,-2976.38 2085.02,-2976.38 2105.06,-2996.42 2105.06,-3031.82 v2@2158.75,-3085.51 ; R3.1@2185,-3023.62 2185,-3070 v2(2165,-3090) 2140,-3115 2140,-3255 2155,-3270 U8.2 U8.2@2200,-3270 ; v1@2435,-3245 2461.13,-3271.13 U5.2 ; v1@2565,-2935 2606.38,-2976.38 2657.2,-2976.38 ; v1@2687.38,-3297.13 U2.3@2794.42,-3297.13 ; v1@3016.04,-121.04 3066.5,-171.5 RD7.2 ; R13.1 3380,-2015 3435,-2070 US1.4@3595,-2070 ; RD3.2 3541.5,-171.5 v1@3605,-235 ; v1@3556.5,-2453.5 3558.5,-2453.5 RD5.2 ; v1@3636.5,-1151.5 RD4.2
  Bottom Layer w20: v1@1220,-2890 1220,-3010 1240,-3030 1275,-3030 1275,-3080 1350,-3155 1350,-3290 1440,-3380 1440,-3960 1580,-4100 ; 1576.55,-4097.81 1592.4,-4113.66 2211.99,-4113.66 ; v1@2830,-3025 2995,-3190 2995,-3570 v1@2890,-3675
  other v1: 485,-4225 2690.95,-3299.51 2425,-3240 2832.21,-3031.28 2560,-2935 1210,-2895 140,-2760 3560,-2450 3645,-1155 290,-810 605,-260 3615,-245 3018.72,-109.99
  other v2: 1541.62,-3816.47 2200.9,-3636.33 1801.38,-3418.81
  other v4: 1935.6,-4050.6
GPIO0_8_: P4.6 U1.17 | length 2848.8
  Bottom Layer w20: P4.6@800,-2445 800,-2590 610,-2780 610,-3040 415,-3235 415,-3795 955.65,-4335.65 U1.17
GPIO0_9_: P4.2 U1.15 | length 3386.4
  Bottom Layer w20: P4.2@800,-2245 655,-2390 655,-2545 510,-2690 510,-2945 360,-3095 360,-3945 810,-4395 1610,-4395 1630.38,-4374.62 U1.15
GPIO0_10_: P3.36 U1.13 | length 3990.6
  Power layer w20: v1@180,-3170 140,-3210 140,-3780 755,-4395 1700,-4395 1725,-4370 1725,-4341.03 U1.13
  Bottom Layer w20: v1(190,-3160) 190,-3120 400,-2910 400,-2635 535,-2500 535,-2310 720,-2125 720,-2000 775,-1945 P3.36@795,-1945
GPIO0_11_: P4.1 U1.14 | length 3161.6
  Top Layer w20: U1.14 U1.14@1730.38,-4230.38
  Bottom Layer w20: P4.1@905,-2245 1050,-2245 1105,-2300 1105,-2830 655,-3280 655,-3725 1082.88,-4152.88 1707.88,-4152.88 1730.38,-4175.38 U1.14
GPIO0_26: P1.30 U1.4 | length 4024
  Top Layer w20: U1.4 2230.38,-4209.62 2285,-4155 3075,-4155 3235,-3995 v1@3235,-2930
  Bottom Layer w20: P1.30@2695,-1655 2740,-1700 2910,-1700 3000,-1610 3130,-1610 3235,-1715 v1@3235,-2915
  other v1: 3238.82,-2922.75
GPIO0_27: P3.30 U6.15 | length 931.6
  Top Layer w15: U6.15 330.72,-2204.28 495,-2040 495,-1815 665,-1645 790,-1645 P3.30@795,-1650
GPIO0_80_: P4.5 U1.18 | length 2709.3
  Top Layer w25: P4.5 900,-2445 P4.5@905,-2440
  Bottom Layer w20: P4.5@895,-2455 895,-2605 665,-2835 665,-3085 495,-3255 495,-3750 980.65,-4235.65 U1.18
GPIO1_0: P3.25 U7.8 | length 922.4
  Top Layer w20: P3.25@920,-1465 1115,-1660 1115,-1825 1250,-1960 U7.8@1540.66,-1956.8
GPIO1_1: P3.8 U6.5 | length 1428
  Bottom Layer w20: U6.5@240,-1705 300,-1705 440,-1565 440,-965 720,-685 720,-620 790,-550 P3.8
GPIO1_3: P3.34 U1.9 | length 4435.3
  Power layer w20: v1@150,-2995 110,-3035 110,-3810 402.24,-4102.24 402.24,-4232.24 605,-4435 1831.03,-4435 U1.9
  Bottom Layer w20: v1(150,-2990) 150,-2965 260,-2855 260,-2530 670,-2120 670,-1975 P3.34@795,-1850
GPIO1_4: P3.23 U7.7 | length 935.6
  Top Layer w20: P3.23@910,-1350 1170,-1610 1170,-1750 1280,-1860 U7.7@1552.34,-1860
GPIO1_5: P3.20 U6.9 | length 1035.1
  Top Layer w15: U6.9 295.72,-1904.28 310,-1890 310,-1622.77 782.77,-1150 P3.20@795,-1150
GPIO1_6: P4.4 U1.6 | length 3696.2
  Power layer w20: v1@460,-3100 315,-3245 310,-3245 310,-3795 645,-4130 2090,-4130 2130.38,-4170.38 U1.6 ; v1(460,-3095) v1@465,-3090
  Bottom Layer w20: v1(460,-3095) 560,-2995 560,-2725 715,-2570 715,-2440 P4.4@805,-2350
GPIO1_7: P3.4 U1.7 | length 7199.5
  Top Layer w20: U1.7 2050,-4316.03 2050,-4310 2075,-4285 3042.08,-4285 3285,-4042.08 v1@3285,-3335
  Bottom Layer w15: 2655,-1600 2910,-1600
  Bottom Layer w20: P3.4@795,-345 840,-300 980.92,-300 1180.92,-500 2115,-500 2200,-585 2200,-1145 2655,-1600 ; 2910,-1600 2970,-1540 3145,-1540 3305,-1700 3305,-3291.07 v1@3280,-3316.07
  other v1: 3285,-3325
GPIO1_12: P1.15 U1.3 | length 4853.3
  Bottom Layer w20: U1.3 2230.38,-4394.62 2255,-4419.24 3012.16,-4419.24 3435,-3996.4 3435,-1435 2945,-945 P1.15@2795,-945
GPIO1_13: P3.40 U1.5 | length 4227
  Bottom Layer w20: P3.40@805,-2145 595,-2355 595,-2525 447.5,-2672.5 447.5,-2942.5 275,-3115 275,-3960 405.54,-4090.54 405.54,-4255.54 578.18,-4428.18 2051.82,-4428.18 2130.38,-4349.62 U1.5
GPIO1_14: P3.26 U6.13 | length 997.4
  Top Layer w15: U6.13 325.72,-2104.28 420,-2010 420,-1745 715,-1450 P3.26
GPIO1_15: P3.22 U6.11 | length 1065.3
  Top Layer w15: U6.11 315.72,-2004.28 350,-1970 350,-1647.66 742.66,-1255 P3.22@795,-1255
GPIO1_16: P1.17 U1.11 | length 4946.5
  Top Layer w15: U1.11 U1.11@1830.38,-4324.39
  Bottom Layer w15: U1.11@1830.38,-4324.39 1871.09,-4283.68 3096.32,-4283.68 3390,-3990 3390,-1545 2890,-1045 P1.17@2805,-1045
GPIO1_17: P1.23 US1.2 | length 1029.5
  Top Layer w25: P1.23@2800,-1345 3035,-1345 3565,-1875 US1.2
GPIO1_28: P1.12 U1.10 | length 5142.3
  Bottom Layer w20: U1.10 1930.38,-4224.62 1970.99,-4184.01 2950.99,-4184.01 3345,-3790 3345,-1585 2860,-1100 2635,-1100 2615,-1080 2615,-785 2645,-755 P1.12@2700,-755
GPIO1_29: P3.6 U6.3 | length 1428.3
  Bottom Layer w20: U6.3@225,-1605 350,-1480 350,-955 650,-655 650,-540 740,-450 P3.6
GPIO1_30: P3.21 U7.6 | length 884.8
  Top Layer w20: P3.21@905,-1240 1240,-1575 1240,-1685 1313.58,-1758.58 1510.53,-1757
GPIO1_31: P3.10 U6.7 | length 1414.5
  Bottom Layer w20: U6.7@230,-1805 245,-1790 285,-1790 485,-1590 485,-970 800,-655 P3.10
GPIO2_1: P3.32 U6.17 | length 938.4
  Top Layer w15: U6.17 340.72,-2304.28 570,-2075 570,-1840 660,-1750 P3.32
GPIO2_6: BT1.26 P3.39 | length 1779.4
  Top Layer w25: BT1.26 699.88,-3435.12 835,-3300 v1@905,-3300 ; v1(895,-3295) v1@905,-3295
  Bottom Layer w25: v1(895,-3295) 1160,-3030 1160,-2260 1045,-2145 P3.39@905,-2145
GPIO2_7: P1.35 R1.1 | length 1743.1
  Top Layer w15: 2630,-2005 2634.95,-2000.05 2739.95,-2000.05 P1.35@2795,-1945
  Top Layer w25: R1.1@1692.54,-2973.7 1692.54,-2837.46 1995,-2535 2270,-2535 2355,-2450 2355,-2220 2570,-2005 2630,-2005
GPIO2_8: P3.5 U6.6 | length 1691.9
  Bottom Layer w20: U6.6 130.72,-1704.28 180,-1655 275,-1655 405,-1525 405,-940 690,-655 690,-570 760,-500 865,-500 900,-465 P3.5
GPIO2_9: P3.12 U6.10 | length 1514.3
  Bottom Layer w15: 189.72,-1850.28 265.52,-1850.28 ; 265.8,-1850 290,-1850
  Bottom Layer w20: U6.10 135.72,-1904.28 189.72,-1850.28 ; 290,-1850 540,-1600 540,-970 570,-940 ; 572.5,-937.5 760,-750 P3.12
GPIO2_10: P3.3 U6.4 | length 1652.8
  Bottom Layer w15: U6.4 U6.4@130.72,-1604.28
  Bottom Layer w20: U6.4@130,-1600 180.65,-1549.35 180.65,-1079.35 620,-640 620,-490 710,-400 850,-400 P3.3
GPIO2_12: P3.11 U6.12 | length 1666.4
  Top Layer w20: P3.11@900,-755 P3.11
  Bottom Layer w20: U6.12 135.72,-2004.28 185,-1955 265,-1955 600,-1620 600,-975 775,-800 850,-800 P3.11@895,-755
GPIO2_13: P3.28 U6.16 | length 1077.7
  Top Layer w15: U6.16 140.72,-2204.28 190,-2155 325,-2155 450,-2030 450,-1795 690,-1555 P3.28@800,-1555
GPIO2_17_: P4.3 U1.16 | length 2892.4
  Bottom Layer w20: P4.3@905,-2345 1010,-2450 1010,-2585 725,-2870 725,-3115 570,-3270 570,-3725 1030.91,-4185.91 1605.91,-4185.91 1630.38,-4210.38 U1.16
GPIO2_22: P3.27 U7.9 | length 945.3
  Top Layer w20: P3.27@910,-1545 1070,-1705 1070,-1905 1225,-2060 U7.9@1524.8,-2062.25
GPIO2_23: P3.29 U7.10 | length 972.5
  Top Layer w20: P3.29@905,-1655 915,-1655 1015,-1755 1015,-1940 1235,-2160 U7.10@1560,-2160
GPIO2_24: P3.31 U6.18 | length 1187.2
  Top Layer w15: U6.18 130.72,-2304.28 180,-2255 335,-2255 530,-2060 530,-1835 665.44,-1699.56 881.52,-1699.56 910,-1728.04 P3.31@910,-1740
GPIO2_131: P3.24 U6.14 | length 1159.3
  Top Layer w15: U6.14 135.72,-2104.28 190,-2050 315,-2050 390,-1975 390,-1670 715,-1345 P3.24@795,-1345
GPIO3_18: P2.2 U2.2 | length 1147
  Top Layer w25: P2.2@2690,-2255 2605,-2340 2605,-2765.3 2728.39,-2888.69 2728.39,-3240.03 2748.81,-3260.45 U2.2
GPIO3_19: P1.27 R12.1 R13.2 | length 837.6
  Top Layer w20: R13.2@3380,-1905 3383.5,-1908.5 R12.1
  Top Layer w25: P1.27 2905,-1550 3270,-1915 R13.2@3385,-1915
GPIO3_21: P1.25 U1.12 | length 4094.6
  Top Layer w20: P1.25@2795,-1450 P1.25 2875,-1450 v1(3105,-1680)
  Bottom Layer w20: U1.12 1830.38,-4175.38 1855.11,-4150.65 2749.35,-4150.65 3170,-3730 3170,-1990.41 3198.81,-1961.6 3198.81,-1783.81 v1@3095,-1680
I2C1_SCL: P1.19 U7.4 | length 1482.9
  Top Layer w15: 2586.52,-1101.52 2751.52,-1101.52
  Top Layer w20: U7.4@1534.11,-1560 2025,-1560 2480,-1105 2595,-1105 ; 2751.52,-1101.52 P1.19
I2C1_SDA: P1.20 U7.5 | length 1360.3
  Top Layer w20: U7.5@1552.99,-1660 2070,-1660 2585,-1145 ; 2585,-1150 P1.20
LED: BT1.24 D10.2 | length 1934.9
  Top Layer w20: D10.2@750,-4355 D10.2 1150.92,-4355 1377.72,-4128.19
  Top Layer w25: BT1.24 817.99,-3397.7 851.64,-3364.05 1003.93,-3364.05 1376.56,-3736.68 1376.56,-4124.72
NetD1_1: D1.1 RD1.1 | length 145.7
  Top Layer w25: RD1.1@543.77,-4165.85 544.55,-4165.07 D1.1
NetD2_1: D2.1 RD2.1 | length 145.6
  Top Layer w20: RD2.1 D2.1 690,-4270 D2.1@695,-4265
NetD3_1: D3.1 RD3.1 | length 111.5
  Top Layer w20: D3.1 RD3.1@3451.5,-113.5
NetD5_1: D5.1 RD4.1 | length 151.5
  Top Layer w25: RD4.1@3575,-1085 3578.5,-1088.5 D5.1
NetD6_1: D6.1 RD5.1 | length 146.5
  Top Layer w25: D6.1 RD5.1@3616.5,-2383.5
NetD7_1: D7.1 RD6.1 | length 131.5
  Top Layer w20: RD6.1@245,-120 248.5,-123.5 D7.1
NetD8_1: D8.1 RD7.1 | length 113.5
  Top Layer w20: RD7.1@3110,-105 3118.5,-113.5 D8.1
NetD9_1: D9.1 RD8.1 | length 91.5
  Top Layer w20: D9.1 RD8.1@591.5,-123.5
NetD10_1: D10.1 R10.1 | length 141.5
  Top Layer w25: R10.1@541.98,-4355 D10.1@683.5,-4355
NetD11_1: D11.1 RD9.1 | length 124.1
  Top Layer w15: RD9.1@385,-1070 RD9.1 D11.1
NetD12_1: D12.1 RD10.1 | length 117
  Top Layer w15: RD10.1@390,-1165 D12.1
NetD13_1: D13.1 RD11.1 | length 117
  Top Layer w15: RD11.1@390,-1365 D13.1
NetD14_1: D14.1 RD12.1 | length 109.9
  Top Layer w15: RD12.1@395,-1260 D14.1
NetD15_1: D15.1 RD13.1 | length 117
  Top Layer w15: RD13.1@390,-1465 D15.1
NetD16_2: D16.2 J5.1 | length 251.5
  Top Layer w75: D16.2@3091.16,-769.72 J5.1
NetD17_1: D17.1 RD14.1 | length 88.5
  Top Layer w20: RD14.1@135,-2620 143.5,-2611.5 D17.1
NetD18_1: D18.1 RD15.1 | length 93.5
  Top Layer w15: RD15.1@145,-1145 153.5,-1153.5 D18.1
NetJ1_2: J1.2 J2.2 | length 164.3
  Top Layer w20: 454.47,-529.47 455,-530
  Top Layer w40: 365.93,-529.47 454.47,-529.47 ; 455,-530 J1.2@530,-530
NetJ5_2: J5.2 J6.2 | length 322
  Top Layer w75: J6.2@3438.68,-547.07 3488.21,-547.07 3529.69,-588.55 3529.69,-690.87 ; J5.2 3521.52,-690.87
NetQ1_1: Q1.1 R2.1 U4.3 | length 468.5
  Top Layer w10: Q1.1@1445.52,-3308.53 1445.52,-3315.88 1453.15,-3323.51 ; 1452.91,-3323.67 1490.95,-3323.67 1584.78,-3229.83 1584.78,-3230.58 ; 1585,-3224.61 R2.1@1585,-3023.62 ; 1585.33,-3232.41 U4.3
NetQ1_3: Q1.3 R5.2 | length 308.2
  Top Layer w20: 1413.23,-3299.44 1385,-3271.21 1385,-3160 1435,-3110 R5.2@1435,-3023.62
NetR1_2: R1.2 U4.2 | length 202.3
  Top Layer w20: R1.2@1692.54,-3038.66 1713.21,-3059.33 U4.2
NetR4_1: R4.1 U3.5 | length 787.6
  Top Layer w15: R4.1@2335,-3023.62 2335,-3436.56 2405.23,-3506.79 2405.23,-3678.18 U3.5@2478.76,-3751.72
NetR7_2: R7.2 R8.1 U5.4 | length 491.2
  Top Layer w15: R8.1@2480,-3020 2640,-3020 2640,-3280 2607.6,-3312.4 U5.4@2582.24,-3312.4
NetR8_2: R8.2 U3.6 U5.1 | length 887.6
  Top Layer w15: 2464.77,-2975.23 R8.2@2485.46,-2975.23
  Top Layer w25: 2464.77,-2975.23 2430,-3010 2430,-3120 2490,-3180 U5.1@2490,-3233.44
  Bottom Layer w25: v1@2440.04,-3125.46 2440.04,-3189.4 2493.21,-3242.56 U3.6@2493.21,-3672.93
  other v1: 2441.46,-3124.04
NetR9_2: R9.2 R11.2 U8.3 | length 493.4
  Top Layer w20: R9.2@1930.21,-3023.62 1944.47,-3037.89 2035,-3037.89 2035,-3050 2095,-3110 2095,-3260 2145,-3310 U8.3@2210,-3310
NetR12_2: R12.2 US1.3 | length 132.1
  Top Layer w20: R12.2@3480,-1980 3485,-1975 US1.3
NetU2_4: U2.4 U3.4 | length 691.4
  Top Layer w15: U3.4@2497.15,-3829.19 2775.36,-3550.97 2775.36,-3406.79 2882.58,-3299.57 U2.4
OUT_LED1: D3.2 P1.22 | length 2096.4
  Top Layer w20: D3.2@3340,-170 3345,-175 v1(3345,-265)
  Bottom Layer w20: P1.22 2665,-1250 2500,-1085 2500,-315 2660,-155 2885,-155 3005,-275 v1@3345,-275
OUT_LED2: D5.2 P1.29 | length 2353.6
  Top Layer w25: P1.29 2925,-1650 3020,-1745 3020,-2160 3110,-2250 3625,-2250 3665,-2210 3665,-1265 D5.2@3640,-1240
OUT_LED3: D6.2 P1.31 | length 1301.5
  Top Layer w25: P1.31 2880,-1750 2935,-1805 2935,-2195 3270,-2530 D6.2@3550,-2530
OUT_LED4: D7.2 P1.28 | length 3526.4
  Top Layer w20: D7.2@375,-185 D7.2 375,-215 465,-305 530,-305 570,-345 v1(665,-345)
  Bottom Layer w20: v1@670,-340 670,-245 798.27,-116.73 958.19,-116.73 1256.46,-415 2215,-415 2305,-505 2305,-1155 P1.28
OUT_LED5: D8.2 P1.24 | length 2120.6
  Top Layer w20: v1(3220,-225) D8.2@3220,-180
  Bottom Layer w20: P1.24 2430,-1080 2430,-315 2630,-115 2930,-115 3050,-235 3200,-235 v1@3215,-220 ; v1(3220,-225) v1@3225,-225
OUT_LED6: D9.2 P1.26 | length 3343.1
  Top Layer w20: v1@495,-250 500,-245 D9.2
  Bottom Layer w20: v1(500,-250) 688.04,-61.96 1011.89,-61.96 1294.93,-345 2320,-345 2370,-395 2370,-1120 P1.26
OUT_LED7: D17.2 P3.33 | length 1263.1
  Top Layer w20: D17.2 610,-2535 715,-2430 715,-1930 745,-1900 850,-1900 P3.33@895,-1855
OUT_LED8: D18.2 P3.9 | length 1003.1
  Top Layer w15: 666.08,-698.92 772.52,-698.92 ; 742.24,-698.63 851.37,-698.63
  Top Layer w20: D18.2@225,-1235 275,-1185 275,-1090 666.08,-698.92 ; 851.37,-698.63 P3.9
OUT_LED9: D11.2 P3.14 | length 319.1
  Top Layer w15: D11.2 605,-850 P3.14
OUT_LED10: D12.2 P3.16 | length 320.2
  Top Layer w15: D12.2 522.27,-1037.73 610,-950 ; 608.89,-950 610,-950 ; P3.16 610,-950
OUT_LED11: D13.2 P3.18 | length 360.5
  Top Layer w15: D13.2 705,-1050 P3.18
OUT_LED12: D14.2 P3.15 | length 465.9
  Top Layer w15: D14.2 653.53,-1001.47 857.79,-1001.47 900,-959.27 P3.15
OUT_LED13: D15.2 P3.17 | length 499.4
  Top Layer w15: D15.2 755,-1100 ; 760,-1099.79 854.61,-1099.79 900,-1054.4 P3.17
PWR_BUT: P1.9
REF: INA1.1 INA2.1 INA3.1 INA4.1 U8.1 U8.4 | length 2277.9
  Top Layer w15: INA4.1 1887.78,-3455.46 v2@1929.76,-3413.48 ; INA3.1 2222.61,-3746.65 v3@2230.2,-3739.06 ; U8.1@2195,-3230 U8.1@2197.76,-3230 ; U8.1@2205,-3230 2230,-3230 2245,-3245 2245,-3270 U8.4@2285,-3310 ; v1@2285,-3370 2292.24,-3362.76 U8.4
  Top Layer w25: v2(1539.76,-3695.76) 1539.76,-3696.29 1576.38,-3732.91 ; v2(1823.9,-4072.76) 1865.08,-4031.58 1873.36,-4031.58 1878.59,-4036.8
  Bottom Layer w25: v2@1547.69,-3695.77 1576.39,-3695.77 1851.58,-3970.96 ; v2(1823.9,-4072.76) 1851.58,-4045.07 1851.58,-3970.96 ; v2@1922.48,-3420.58 1922.48,-3547.2 2069.37,-3694.09 2069.37,-3803.82 ; v3@2224.69,-3748.1 2168.98,-3803.82 2069.37,-3803.82 ; 1851.58,-3970.96 1902.23,-3970.96 2069.37,-3803.82
  Bottom Layer w30: v3@2243.28,-3741.25 2277.04,-3707.5 2277.04,-3372.96 v1@2290,-3360
  other v1: 2290,-3370
  other v2: 1931.61,-3409.77
  other v3: 2232.79,-3741.25
SYS_5V: P1.7 P1.8 | length 95
  Power layer w40: P1.8@2705,-550 P1.7
SYS_RESETN: P1.10
TIMER4: P3.7 U1.8 U6.8 | length 6043.6
  Top Layer w20: v1(420,-740) 565,-740 705,-600 860,-600 900,-560 P3.7
  Power layer w20: U6.8@120,-1805 117.11,-1802.11 63.44,-1802.11 63.44,-2393.44 205,-2535 205,-2955 250,-3000 250,-3810 610,-4170 2010,-4170 2030.38,-4190.38 U1.8
  Bottom Layer w20: U6.8@125,-1805 62.46,-1742.46 62.46,-903.11 225.57,-740 v1(420,-740)
UART4_RXD: BT1.1 P3.38 | length 2689.1
  Top Layer w15: P3.38@805,-2060 844.52,-2099.52 979.52,-2099.52 990,-2110
  Top Layer w25: BT1.1 120.23,-3900.65 120.23,-3354.77 275,-3200 420,-3200 650,-2970 ; 652.5,-2967.5 1110,-2510 1110,-2230 990,-2110
UART4_TXD: BT1.2 P3.37 | length 2829.1
  Top Layer w25: BT1.2 286.5,-3906.1 170.49,-3790.09 170.49,-3374.51 260,-3285 610,-3285 1185,-2710 1185,-2190 1045,-2050 P3.37@905,-2050
UART5_RXD: P1.11 R3.2 R4.2 | length 3185.9
  Top Layer w15: v1@2255,-2895 2185,-2965 2185,-2976.38 2328.62,-2976.38 R4.2@2335,-2970 ; 2295,-700 2750,-700 P1.11
  Top Layer w40: v1@2002.5,-992.5 2295,-700
  Bottom Layer w40: v1(2005,-1000) 2005,-1410 2255,-1660 v1@2255,-2880
  other v1: 2260,-2890
UART5_TXD: P1.13 U5.3 | length 3333.9
  Top Layer w15: 2190,-900 2755,-900 2800,-855 P1.13 ; v1@2376.36,-3334 2397.96,-3312.4 U5.3@2487.76,-3312.4
  Top Layer w40: v1@2110,-980 2190,-900
  Bottom Layer w40: v1(2105,-990) 2105,-1325 2410,-1630 2410,-3045.84 2369.82,-3086.02 v1@2369.82,-3313.78
  other v1: 2382.3,-3332.81
VDD_5V: D2.2 D16.1 INA1.3 INA2.3 INA3.3 INA4.3 J1.1 P1.5 P1.6 U2.5 U3.1 U5.5 U8.5 US1.1 | length 1830.4
  Top Layer w15: v2(1611.02,-3824.46) 1610.67,-3824.46 1600.65,-3814.44 1616.65,-3798.44 INA1.3 ; v2(1804.88,-3492.2) 1805.11,-3492.2 1807.83,-3494.92 INA4.3@1846.65,-3494.92 ; INA2.3 1938.35,-3993.35 ; INA2.3@1934.45,-3993.05 1964.62,-3993.05 2029.47,-4057.9 v2(2031.9,-4057.9) ; v2@2140.61,-3687.03 INA3.3
  Top Layer w20: INA3.3@2148.35,-3710.8 INA3.3
  Top Layer w30: D2.2 984.44,-4270 v1@1229.39,-4025.05 ; v1(2265,-3145) 2292.24,-3172.24 U8.5 ; v1(2555,-3145) 2582.24,-3172.24 U5.5@2582.24,-3227.82 ; v1(2858.21,-3138.75) 2885.45,-3165.99 U2.5@2885.45,-3221.57
  Top Layer w75: P1.6@2695,-450 D16.1@3062.91,-450
  Top Layer w100: D16.1 3165,-391.22
  Power layer w15: 1563.8,-3870.99 1564.49,-3870.99 ; 1977.74,-4025 1980,-4025 2012.9,-4057.9 v2(2031.9,-4057.9) ; 1980,-4020 2013.66,-4053.66 v2@2015.48,-4053.66 ; 2491.61,-4116.29 2491.86,-4116.04
  Power layer w20: v2(2139.74,-3687.03) 2139.74,-3677.19 2146.26,-3670.68 2146.26,-3644.27
  Power layer w40: 1564.49,-3870.99 v2(1611.02,-3824.46)
  other v1: 1237.5,-4030.85 3165,-360
VDD_ADC: P1.32 R9.1 | length 1835.7
  Top Layer w40: 1930.94,-2946.27 2067.2,-2810 2480,-2810 v1(2520,-2770)
  Bottom Layer w40: v1(2520,-2770) 2520,-1795 2565,-1750 P1.32
pads on no net: BT1.3 BT1.4 BT1.5 BT1.6 BT1.7 BT1.8 BT1.9 BT1.10 BT1.11 BT1.14 BT1.15 BT1.16 BT1.17 BT1.18 BT1.19 BT1.20 BT1.21 BT1.22 BT1.23 BT1.25 BT1.27 BT1.28 BT1.29 BT1.30 BT1.31 BT1.32 BT1.33 BT1.34 J3.2 J4.2 P1.18 P1.21 P1.33 P2.1 P3.35 U2.1 U3.3 U7.1

## Polygon pours and split planes (outlines as drawn)
GND on Bottom Layer "Top Layer-No Net 1" (solid, remove dead copper, pour order 8): 71.79,-4434.21 135,-4435 3645,-4435 3645,-75 3640,-80 2315,-80 2315,-290 2265,-340 1485,-340 1485,-85 1465,-65 51.02,-60.55 45.39,-4422.82 45.11,-4433.93
VDD_5V on Power layer "Power layer-No Net" (solid, remove dead copper, pour order 4): 115,-55 120,-60 1465,-60 1465,-355 1460,-360 1475,-375 2335,-375 2335,-65 2345,-55 3630,-55 3630,-4430 3635,-4435 3625,-4425 130,-4425 130,-65 120,-55
GND on Top Layer "Top Layer-No Net" (solid, remove dead copper, pour order 6): 3635,-4425 3645,-4435 3655,-4425 3655,-60 2100,-60 2105,-330 2065,-330 1940,-325 1555,-330 1305,-325 1300,-65 50.7,-53.41 49.61,-94.26 47.06,-4428.54
GND on Ground layer (split plane): 3729.9,-4454.9 20.1,-4454.9 21.54,-20.1 1329.9,-20.1 1329.9,-275 1330.29,-278.92 1331.43,-282.69 1333.29,-286.17 1335.79,-289.21 1338.83,-291.71 1342.31,-293.57 1346.08,-294.71 1350,-295.1 2050,-295.1 2053.92,-294.71 2057.69,-293.57 2061.17,-291.71 2064.21,-289.21 2066.71,-286.17 2068.57,-282.69 2069.71,-278.92 2070.1,-275 2070.1,-20.1 3729.9,-20.1

## Keep-outs
Keep-Out Layer:
  lines w10: 0,-20 0,0 ; 0,-16.18 0,-4475 3750,-4475 3750,0 2050,0 2050,-275 1350,-275 1350,0 1.57,-0.18

## Silkscreen, mask and mechanical layers (free items; w line width, h text height)
Top Overlay:
  circle w10: c1880,-1880 r625
  lines w10: 1010,-2750 1880,-1880 ; 1010,-1010 1880,-1880 ; 2750,-2750 1880,-1880 ; 3110,-1880 1880,-1880 ; 60,-2535 315,-2280 315,-1495 60,-1240 1235,-65 1490,-320 2275,-320 2530,-65 3705,-1240 3450,-1495 3450,-2280 3705,-2535 2530,-3710 2275,-3455 1490,-3455 1235,-3710 60,-2535
  lines w15: 1370,-825 1370,-500 2280,-500 2280,-825 1370,-825
  text "QuadCape" at 1699,-617 h60
  text "Rev. 3.10" at 1700,-750 h60
  text "3.3 Volts Supply" at 810,-4180 h40
  text "5 Volts Supply" at 885,-4275 h40
  text "BT Status" at 880,-4370 h40

## Text inside footprints (layer, text, board x,y; h text height)
U1: Mechanical 5 "*" at 2378.38,-4382.65 h30
U2: Mechanical 5 "*" at 2785.58,-3230.45 h25
U6: Mechanical 5 "*" at 275.89,-1456.28 h30 r90